# Altium PCB OnkoV1.PcbDoc (part 2 of 2)
Units mil, origin at the board's own origin, x right, y up, seen from the top; angles counter-clockwise.
Board outline 5157.48 x 3228.35 mil, 2 copper layers (Top Layer, Bottom Layer); 231 components, 195 nets, 743 pads, 146 vias.
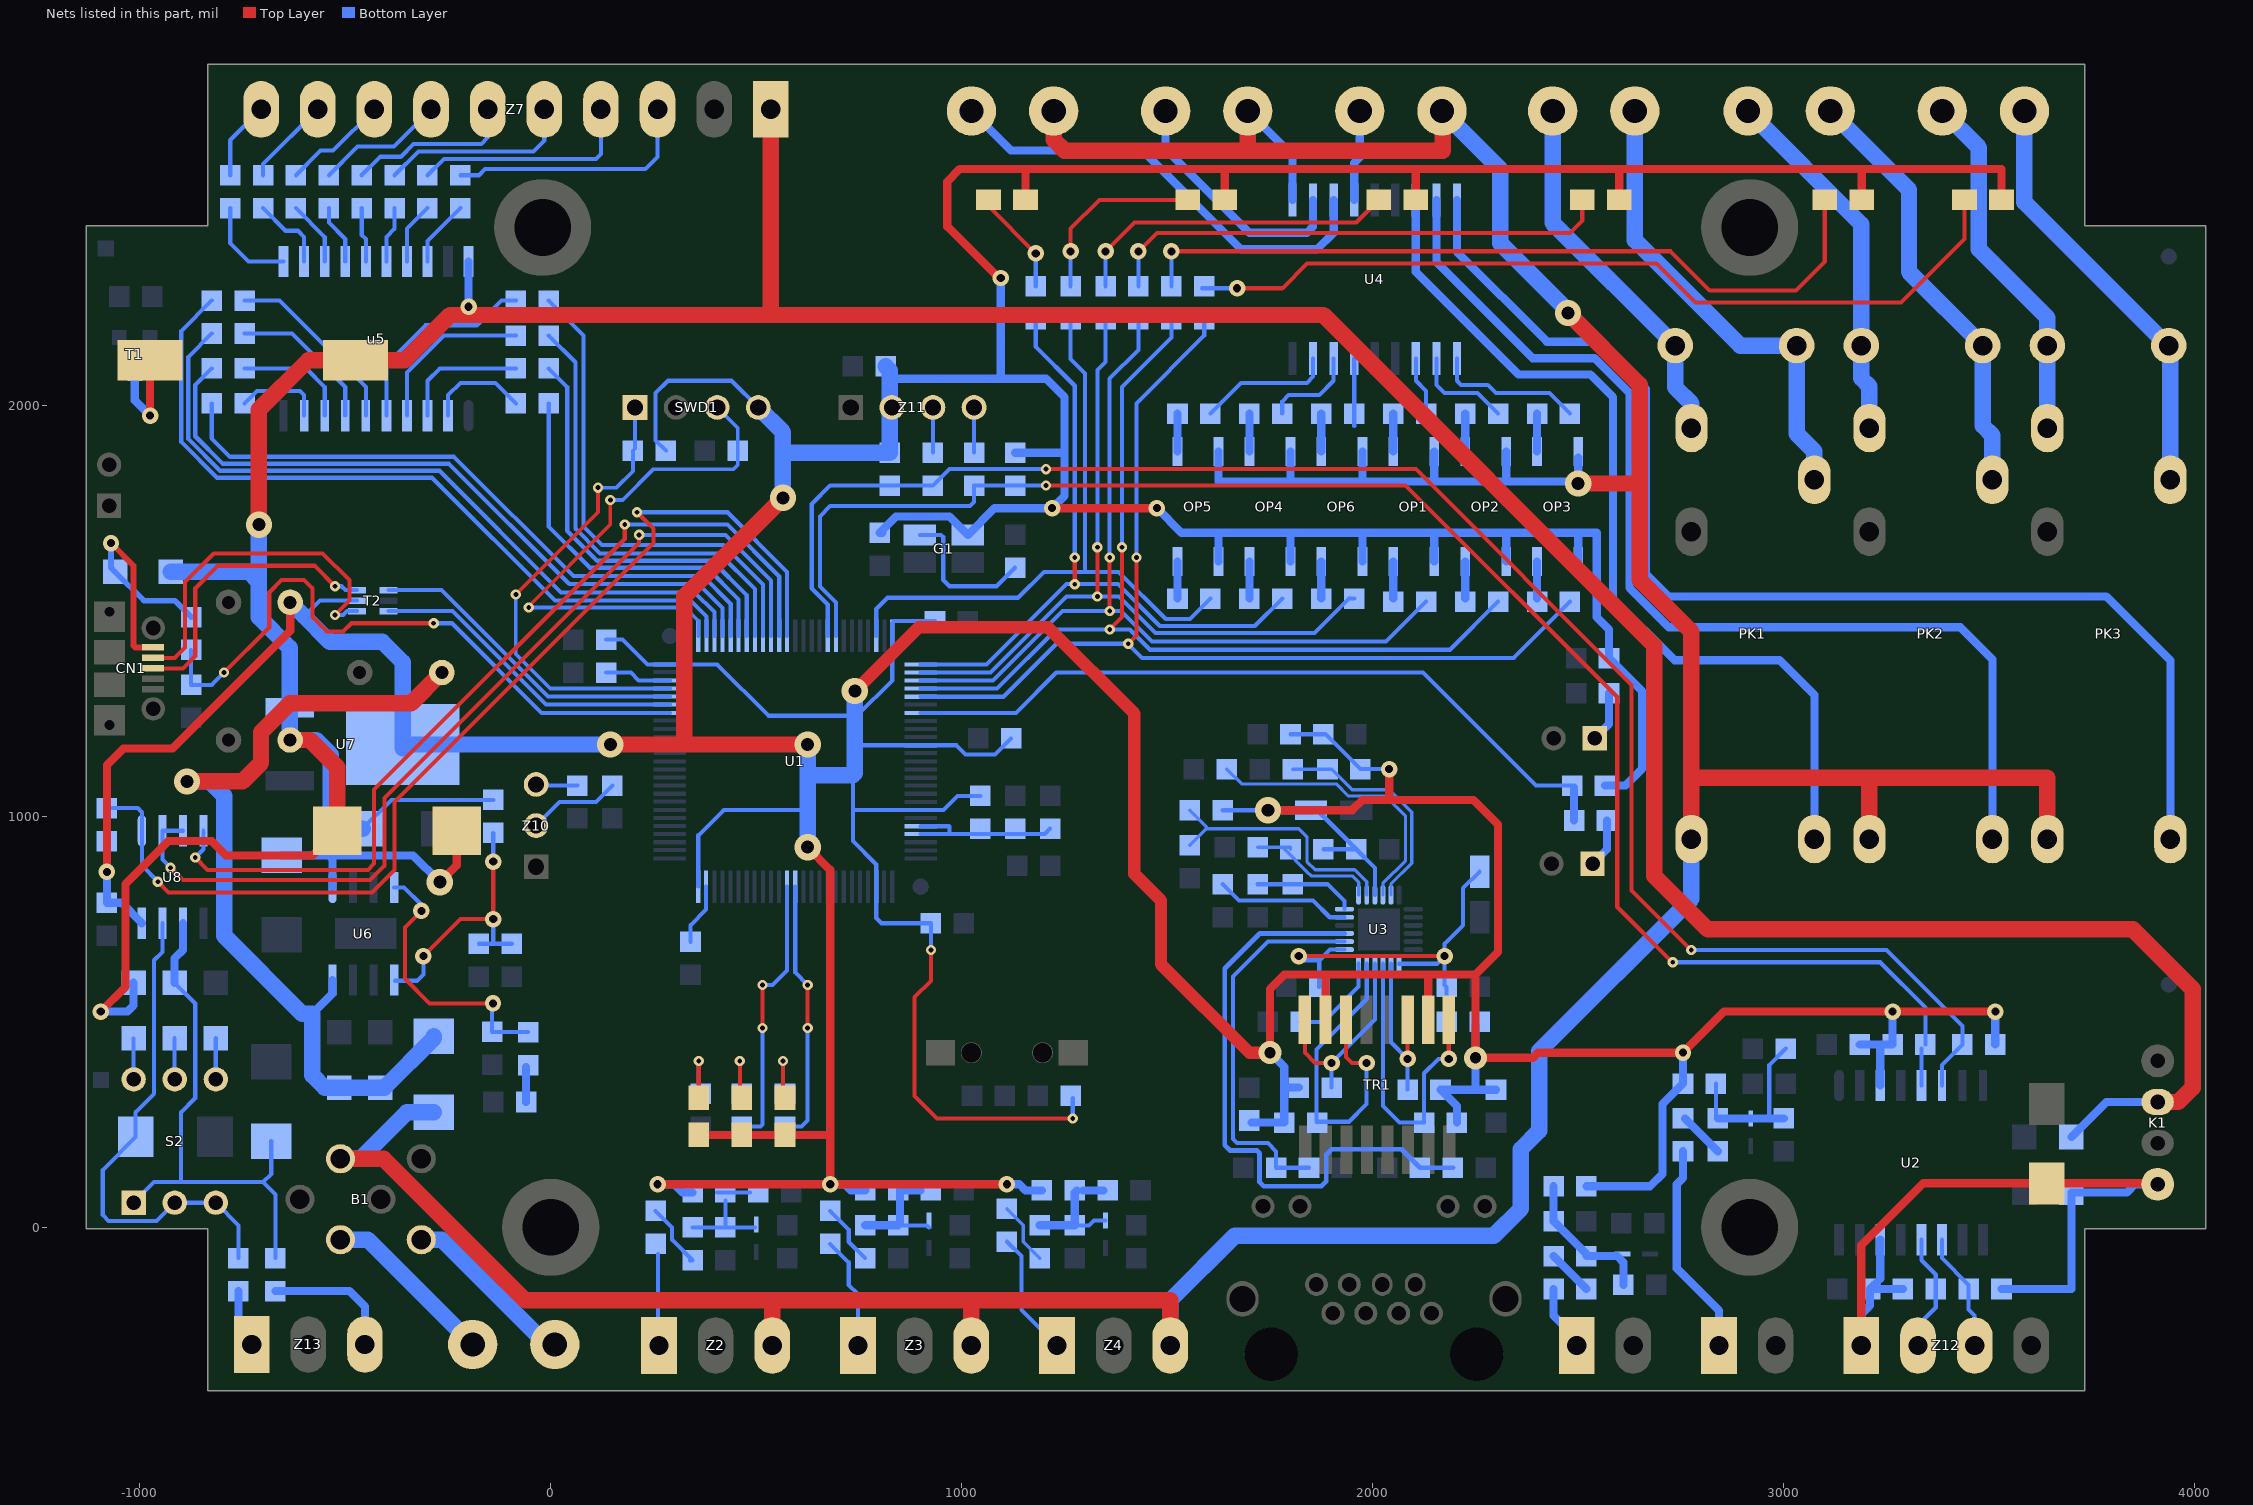
[diagram p2: the nets of this part, all layers, seen from the top]

## Via types
v1: diameter 25, hole 11.81, Top Layer to Bottom Layer, tented both sides, 71 vias
v2: diameter 40, hole 19.68, Top Layer to Bottom Layer, tented both sides, 47 vias
v3: diameter 64, hole 31.5, Top Layer to Bottom Layer, tented both sides, 16 vias
v4: diameter 56, hole 27.56, Top Layer to Bottom Layer, tented both sides, 5 vias
v5: diameter 25, hole 11.81, Top Layer to Bottom Layer, tented bottom, 5 vias
v6: diameter 70.87, hole 39.37, Top Layer to Bottom Layer, tented both sides, 1 vias
v7: diameter 64, hole 31.5, Top Layer to Bottom Layer, 1 vias

## Nets (pads, with @x,y where several pads share a name; then routed paths per layer and width w, separated by ;. In a path a pad name is that pad's centre, name@x,y a point inside that pad or via, vN(x,y) a via of type N, cw(c..) or ccw(c..) an arc to the next point about the centre after c; other vN are vias at no path point) (continued)
KY2: F18.2 R52.1 U1.7 | length 1819.5
  Bottom Layer w10: U1.7@900,1252 1132,1252 1230,1350 2122.44,1350 2397.44,1075 R52.1@2485,1075
  Bottom Layer w20: F18.2@2490,990 R52.1@2490,1070
L+: D8.K F3.1 R56.2 S2.1 U8.6 | length 1315.1
  Bottom Layer w10: S2.1@-1015,60 -965,110 -900,110 ; R56.2@-915.21,595.13 -865,544.91 -865,315 -900,280 -900,110 ; D8.K@-680,210 -680,130 -700,110 ; F3.1@-670,-75 -670,80 -700,110 ; -900,110 -700,110
  Bottom Layer w20: R56.2@-915.21,595.13 -915.21,654.79 -895,675 U8.6@-895,740
L-: D7.K F2.1 S2.2 S2.3 U8.7 | length 1227.1
  Bottom Layer w10: U8.7@-945,740 -945,670 -965,650 -965,325 -1010,280 D7.K@-1010,220 -1090,140 -1090,30 -1075.75,15.75 -959.25,15.75 S2.2@-915,60 S2.3@-815,60 -760,5 F2.1@-760,-75
LED1: R93.2 U1.38 | length 642.6
  Top Layer w10: v1(625,485) v1(625,590)
  Bottom Layer w10: R93.2@570,245 610,245 625,260 v1(625,485) ; U1.38@595,829 595,620 v1(625,590)
LED2: R94.2 U1.39 | length 670.6
  Top Layer w10: v1(515,485) v1(515,590)
  Bottom Layer w10: R94.2@465,245 510,245 515,250 v1(515,485) ; v1(515,590) 540,590 575,625 U1.39@575,829
NetB1_B: B1.B Z1.2 | length 427.5
  Bottom Layer w40: B1.B@-511.85,-30 -445,-30 Z1.2@-190,-285
NetB1_PSG: B1.PSG Z1.1 | length 430.6
  Bottom Layer w40: B1.PSG@-315,-30 -265,-30 -10,-285 Z1.1@10,-285
NetBZ1_2: BZ1.2 T1.3 | length 260.3
  Top Layer w20: v2(-975,1975) BZ1.2@-975,2110
  Bottom Layer w20: T1.3@-1012,2085 -1012,2012 v2(-975,1975)
NetC8_2: C8.2 C9.2 C10.2 L1.1 U3.1 U3.19 | length 1067.2
  Top Layer w10: v2(1820,660) v2(2175,660)
  Bottom Layer w10: v2(1820,660) 1830,650 1870,650 ; C8.2@1870,585 1870,650 ; U3.1@1931.34,675.79 1895.79,675.79 1870,650 ; U3.19@2064.21,641.34 2156.34,641.34 v2(2175,660) ; L1.1@2180,500 C9.2@2180,585 2175,590 v2(2175,660) ; C10.2@2260,865.24 2220,825.24 2220,735 2175,690 v2(2175,660)
NetC11_2: C11.2 C13.2 U3.6 | length 247.9
  Bottom Layer w10: C11.2@1720,835 C13.2@1805,835 1890,835 1931.34,793.66 U3.6@1931.34,774.21
NetC17_1: C17.1 C18.1 R48.1 U1.21 U1.22 | length 408.8
  Bottom Layer w10: U1.22@900,957 970,957 ; U1.21@900,976 969,976 970,975 970,957 ; C17.1@1215,970 1202,957 1130,957 970,957
NetC19_2: C19.2 U1.73 | length 162.9
  Bottom Layer w10: C19.2@135,1350 195,1350 214,1331 U1.73@290,1331
NetC21_2: C21.2 U1.49 | length 149.7
  Bottom Layer w10: C21.2@340,695 340,735 378,773 U1.49@378,829
NetC32_2: C32.2 C38.2 C41.2 D10.K U6.8 | length 2126.5
  Top Layer w40: v3(-885,1085) -750,1085 -705,1130 -705,1205 -635,1275 -340,1275 C41.2@-265,1350
  Bottom Layer w20: -580,520 -531,569 U6.8@-531,602
  Bottom Layer w40: v3(-885,1085) -830,1085 -795,1050 -795,710 -605,520 -580,520 -580,370 -549.87,339.87 C32.2@-515,339.87 C38.2@-415,339.87 -405,339.87 -285,459.87 D10.K@-285,465.04
NetC33_1: C33.1 R89.1 | length 85
  Bottom Layer w20: R89.1@-60,305 C33.1@-60,390
NetC33_2: C33.2 C34.1 U6.4 | length 677.5
  Top Layer w10: v2(-315,770) -355,730 -355,605 -295,545 v2(-140.48,545)
  Bottom Layer w10: U6.4@-381,827 -357,827 -315,785 v2(-315,770) ; v2(-140.48,545) -142.74,542.74 C34.1@-142.74,475.89 -141.85,475 C33.2@-55,475
NetD1_K: D1.K R1.2 R2.2 R3.2 R4.2 | length 296.9
  Bottom Layer w10: R3.2@345,0 R4.2@425,0 ; R1.2@405,85 R2.2@485,85 ; R1.2@425,65 R4.2@425,0 ; D1.K@496.93,0 R4.2@425,0
NetD2_K: D2.K R5.2 R6.2 R7.2 R8.2 | length 287.1
  Bottom Layer w10: R8.2@845,5 915,5 D2.K@920,0
  Bottom Layer w20: R7.2@765,5 R8.2@845,5 ; R8.2@850,10 850,90 R6.2@900,90
NetD3_K: D3.K R9.2 R10.2 R11.2 R12.2 | length 302
  Bottom Layer w10: R12.2@1275,5 1310,5 1321.93,16.93 D3.K@1350,16.93
  Bottom Layer w20: R11.2@1190,5 R12.2@1275,5 1275,85 R9.2@1280,90 ; R9.2@1295,90 R10.2@1345,90
NetD4_K: D4.K R13.2 R14.2 R15.2 R16.2 | length 354.4
  Bottom Layer w20: R13.2@2440,100 R14.2@2440,15 2520,-65 R15.2@2520,-70 2595,-70 2610,-85 R16.2@2610,-140
NetD5_K: D5.K R17.2 R18.2 R19.2 R20.2 | length 428.6
  Bottom Layer w10: R19.2@2835,270 R17.2@2835,350 ; 2960,265 2965,270 2965,395 R18.2@3005,435
  Bottom Layer w20: R19.2@2840,265 D5.K@2920,265 2960,265 R20.2@3000,265
NetD6_K: D6.K L2.1 U6.1 | length 635.8
  Top Layer w20: v3(-270,840) -228.66,881.34 L2.1@-228.66,965
  Bottom Layer w20: D6.K@-655,905 -540,905 ; U6.1@-531,827 -531,896 -540,905 ; v3(-270,840) -335,905 -540,905
NetDK1_K: DK1.K R72.1 | length 1246.1
  Top Layer w10: v2(1430,2375) 1475,2420 2480,2420 2510,2450 DK1.K@2510,2500
  Bottom Layer w10: R72.1@1430,2290 v2(1430,2375)
NetDK2_K: DK2.K R73.1 | length 1893.3
  Top Layer w10: v2(1510,2375) 2725,2375 2820,2280 3030,2280 3100,2350 DK2.K@3100,2500
  Bottom Layer w10: R73.1@1510,2290 v2(1510,2375)
NetDK3_K: DK3.K R74.1 | length 2078.4
  Top Layer w10: v2(1670,2285) 1780,2285 1840,2345 2690,2345 2785,2250 3285,2250 3440,2405 DK3.K@3440,2500
  Bottom Layer w10: R74.1@1585,2285 v2(1670,2285)
NetDK4_K: DK4.K R75.1 | length 257.6
  Top Layer w10: DK4.K@1065,2500 1065,2485 v2(1180,2370)
  Bottom Layer w10: R75.1@1180,2290 v2(1180,2370)
NetDK5_K: DK5.K R76.1 | length 454
  Top Layer w10: v2(1265,2375) 1265,2430 1335,2500 DK5.K@1550,2500
  Bottom Layer w10: R76.1@1265,2290 v2(1265,2375)
NetDK6_K: DK6.K R77.1 | length 801.8
  Top Layer w10: v2(1350,2375) 1420,2445 1960,2445 DK6.K@2015,2500
  Bottom Layer w10: R77.1@1350,2290 v2(1350,2375)
NetF1_1: F1.1 Z2.1 | length 223.5
  Bottom Layer w10: F1.1@260.75,-65 260.75,-80 260.75,-284.84 Z2.1@263.31,-287.4
NetF1_2: F1.2 R3.1 | length 163.5
  Bottom Layer w10: F1.2@255,40 295,0 295,-30 R3.1@345,-80 R3.1@338.74,-80
NetF2_2: F2.2 Z13.1 | length 143.3
  Bottom Layer w20: F2.2@-760,-155 -760,-252.79 Z13.1@-727.79,-285
NetF3_2: F3.2 Z13.3 | length 325.7
  Bottom Layer w20: F3.2@-670,-155 -490,-155 -452.2,-192.8 Z13.3@-452.2,-285
NetF4_1: F4.1 Z3.1 | length 275.4
  Bottom Layer w10: F4.1@680,-40 725,-85 725,-140 747.56,-162.56 Z3.1@747.56,-287.4
NetF4_2: F4.2 R7.1 | length 150.2
  Bottom Layer w10: F4.2@680,40 725,-5 725,-35 R7.1@765,-75
NetF5_1: F5.1 Z4.1 | length 302.9
  Bottom Layer w10: F5.1@1110,-35 1145,-70 1145,-200.59 Z4.1@1231.81,-287.4
NetF5_2: F5.2 R11.1 | length 153.1
  Bottom Layer w8: F5.2@1110,45 1150,5 1150,-35 R11.1@1190,-75
NetF6_1: F6.1 Z5.1 | length 160.6
  Bottom Layer w20: F6.1@2440,-150 2440,-215 2496.06,-271.06 Z5.1@2496.06,-287.4
NetF6_2: F6.2 R15.1 | length 113.1
  Bottom Layer w20: F6.2@2440,-70 R15.1@2520,-150
NetF7_1: F7.1 Z6.1 | length 521.1
  Bottom Layer w20: F7.1@2755,185 2755,120 2740,105 2740,-100 2842.52,-202.52 Z6.1@2842.52,-287.4
NetF7_2: F7.2 R19.1 | length 113.1
  Bottom Layer w20: F7.2@2760,265 R19.1@2840,185
NetF8_1: F8.1 Z11.3 | length 110
  Bottom Layer w10: F8.1@930,1885 Z11.3@930,1995
NetF9_1: F9.1 Z11.4 | length 110
  Bottom Layer w10: F9.1@1030,1885 Z11.4@1030,1995
NetF10_1: F10.1 u5.2 | length 248.1
  Bottom Layer w10: u5.2@-250,1975 -250,2025 -220,2055 -135,2055 F10.1@-85,2005
NetF11_1: F11.1 u5.3 | length 312.4
  Bottom Layer w10: u5.3@-300,1975 -300,2060 -270,2090 F11.1@-85,2090
NetF12_1: F12.1 u5.4 | length 407.3
  Bottom Layer w10: u5.4@-350,1975 -350,2080 -260,2170 F12.1@-85,2170
NetF13_1: F13.1 u5.5 | length 504.2
  Bottom Layer w10: u5.5@-400,1975 -400,2100 -305,2195 -180,2195 -120,2255 F13.1@-85,2255
NetF14_1: F14.1 u5.6 | length 452
  Bottom Layer w10: F14.1@-745,2255 -660,2255 -450,2045 u5.6@-450,1975
NetF15_1: F15.1 u5.7 | length 368.8
  Bottom Layer w10: F15.1@-745,2175 -630,2175 -500,2045 u5.7@-500,1975
NetF16_1: F16.1 u5.8 | length 283.6
  Bottom Layer w10: F16.1@-745,2090 -595,2090 -550,2045 u5.8@-550,1975
NetF17_1: F17.1 u5.9 | length 211.6
  Bottom Layer w10: F17.1@-745,2005 -715,2035 -610,2035 -600,2025 u5.9@-600,1975
NetF18_1: F18.1 KY2.1 | length 119.5
  Bottom Layer w20: KY2.1@2535,885 2570,920 F18.1@2570,990
NetF19_1: F19.1 KY1.1 | length 124.5
  Bottom Layer w20: KY1.1@2540,1190 2575,1225 F19.1@2575,1300
NetG1_3: G1.3 R44.1 | length 363.9
  Bottom Layer w10: G1.3@898,1685 950,1685 955,1680 955,1575 970,1560 1085,1560 R44.1@1130,1605
NetLD1_K: LD1.K R93.1 | length 165
  Top Layer w10: LD1.K@565,315 v1(565,405)
  Bottom Layer w10: R93.1@565,330 v1(565,405)
NetLD2_K: LD2.K R94.1 | length 165
  Top Layer w10: LD2.K@460,315 v1(460,405)
  Bottom Layer w10: R94.1@460,330 v1(460,405)
NetLD3_K: LD3.K R95.1 | length 165
  Top Layer w10: LD3.K@360,315 v1(360,405)
  Bottom Layer w10: R95.1@360,330 v1(360,405)
NetOP1_2: OP1.2 R60.2 | length 90
  Bottom Layer w20: R60.2@2050,1530 OP1.2@2050,1620
NetOP1_3: OP1.3 R61.1 | length 92.3
  Bottom Layer w20: OP1.3@2050,1887.72 R61.1@2050,1980
NetOP2_2: OP2.2 R62.2 | length 90
  Bottom Layer w20: R62.2@2225,1530 OP2.2@2225,1620
NetOP2_3: OP2.3 R63.1 | length 92.3
  Bottom Layer w20: OP2.3@2225,1887.72 R63.1@2225,1980
NetOP3_2: OP3.2 R64.2 | length 90
  Bottom Layer w20: R64.2@2400,1530 OP3.2@2400,1620
NetOP3_3: OP3.3 R65.1 | length 92.3
  Bottom Layer w20: OP3.3@2400,1887.72 R65.1@2400,1980
NetOP4_2: OP4.2 R66.2 | length 90
  Bottom Layer w20: R66.2@1700,1530 OP4.2@1700,1620
NetOP4_3: OP4.3 R67.1 | length 92.3
  Bottom Layer w20: OP4.3@1700,1887.72 R67.1@1700,1980
NetOP5_2: OP5.2 R68.2 | length 90
  Bottom Layer w20: R68.2@1525,1530 OP5.2@1525,1620
NetOP5_3: OP5.3 R69.1 | length 92.3
  Bottom Layer w20: OP5.3@1525,1887.72 R69.1@1525,1980
NetOP6_2: OP6.2 R70.2 | length 90
  Bottom Layer w20: R70.2@1875,1530 OP6.2@1875,1620
NetOP6_3: OP6.3 R71.1 | length 92.3
  Bottom Layer w20: OP6.3@1875,1887.72 R71.1@1875,1980
NetR24_1: R24.1 R30.2 U3.8 | length 629.7
  Bottom Layer w8: R30.2@1555,930 1595,970 ; R24.1@1555,1015 1595,975 1595,970 ; U3.8@1985.47,808.66 1985.47,840.74 1956.21,870 1860,870 1840,890 1840,950.56 1820.56,970 1595,970
NetR25_1: R25.1 R33.2 U3.11 | length 555.7
  Bottom Layer w8: R33.2@1805,1115 R25.1@1890,1115 1900,1115 1950.38,1064.62 2040.38,1064.62 2095,1010 2095,886.21 2044.53,835.74 U3.11@2044.53,808.66
NetR27_1: R27.1 R31.2 U3.7 | length 336.6
  Bottom Layer w8: R31.2@1720,925 R27.1@1780.56,925 ; R27.1@1800,920 1800,925 R27.1@1780.56,925 ; U3.7@1965.79,808.66 1965.79,839.21 1950,855 1850,855 1850,855.56 1841,864.56 R27.1@1780.56,925
NetR32_2: R32.2 U3.24 | length 231.9
  Bottom Layer w10: R32.2@1825,500 1880,500 1965.79,585.79 U3.24@1965.79,641.34
NetR34_2: R34.2 R38.2 U3.3 | length 1488
  Bottom Layer w12: U3.3@1931.34,715.16 1725.16,715.16 1640,630 1640,200 1653,187 1718,187 1725,180 1725,110 1735,100 1875,100 1887,112 1887,177 1900,190 2070,190 R34.2@2115,145 R38.2@2195,145
NetR35_2: R35.2 R37.2 U3.2 | length 939.2
  Bottom Layer w10: R37.2@1845,145 R35.2@1765,145 1765,185 1745,205 1670,205 1660,215 1660,610 1745.47,695.47 U3.2@1931.34,695.47
NetR36_2: R36.2 U3.5 | length 329.7
  Bottom Layer w10: R36.2@1635,835 1675,795 1855,795 1895.47,754.53 U3.5@1931.34,754.53
NetR39_2: R39.2 U3.10 | length 696.8
  Bottom Layer w8: R39.2@1645,1115 1681,1079 1911,1079 1940.38,1049.62 2030.38,1049.62 2080,1000 2080,892.43 2024.84,837.27 U3.10@2024.84,808.66
NetR50_1: R50.1 Z10.3 | length 101.8
  Bottom Layer w10: Z10.3@-35.65,1077.67 -32.98,1075 R50.1@65,1075
NetR51_1: R51.1 Z10.2 | length 226
  Bottom Layer w10: Z10.2@-35.65,977.67 21.67,1035 110,1035 R51.1@150,1075
NetR55_1: R55.1 S2.4 | length 99.9
  Bottom Layer w10: S2.4@-815.21,360.21 R55.1@-815.21,460.13
NetR56_1: R56.1 S2.5 | length 99.9
  Bottom Layer w10: S2.5@-915.21,360.21 R56.1@-915.21,460.13
NetR57_1: R57.1 S2.6 | length 100
  Bottom Layer w10: S2.6@-1015,360 R57.1@-1015,460
NetR78_1: R78.1 u5.18 | length 163.1
  Bottom Layer w10: u5.18@-300,2350 -300,2400 R78.1@-220,2480
NetR79_1: R79.1 u5.17 | length 150.7
  Bottom Layer w10: u5.17@-350,2350 -350,2430 R79.1@-300,2480
NetR80_1: R80.1 u5.16 | length 138.3
  Bottom Layer w10: u5.16@-400,2350 -400,2410 -380,2430 R80.1@-380,2480
NetR81_1: R81.1 u5.15 | length 134.1
  Bottom Layer w10: R81.1@-460,2480 -460,2415 -450,2405 u5.15@-450,2350
NetR82_1: R82.1 u5.14 | length 146.6
  Bottom Layer w10: R82.1@-540,2480 -540,2445 -500,2405 u5.14@-500,2350
NetR83_1: R83.1 u5.13 | length 159
  Bottom Layer w10: R83.1@-620,2480 -550,2410 u5.13@-550,2350
NetR84_1: R84.1 u5.12 | length 189
  Bottom Layer w10: R84.1@-700,2480 -645,2425 -615,2425 -600,2410 u5.12@-600,2350
NetR85_1: R85.1 u5.11 | length 233.6
  Bottom Layer w10: R85.1@-780,2480 -780,2395 -735,2350 u5.11@-650,2350
NetR86_2: R86.2 R87.1 R88.1 U6.5 | length 677.5
  Top Layer w10: v2(-310,660) -220,750 v2(-140,750) v2(-140,890)
  Bottom Layer w10: U6.5@-379,600 -325,600 -310,615 v2(-310,660) ; R87.1@-175,690 -140,690 ; v2(-140,750) -140,690 ; v2(-140,890) R86.2@-140,960 ; R88.1@-95,690 -140,690
PK1: R61.2 U4.3 | length 144.5
  Bottom Layer w10: U4.3@2105,2114.17 2105,2060 2130,2035 R61.2@2130,1980
PK1_A: C29.2 PK1.4 Z15.2 | length 1159
  Bottom Layer w40: Z15.2@2637.8,2716.54 2637.8,2402.2 2894.33,2145.67 C29.2@3031.5,2145.67 3031.5,1931.5 3074.8,1888.19 PK1.4@3074.8,1818.9
PK1_B: C29.1 PK1.5 Z15.1 | length 911.6
  Bottom Layer w40: Z15.1@2437.8,2716.54 2437.8,2444.09 C29.1@2736.22,2145.67 2736.22,2043.78 2775.59,2004.41 PK1.5@2775.59,1944.88
PK2: R63.2 U4.2 | length 243.2
  Bottom Layer w10: U4.2@2155,2114.17 2155,2050 2175,2030 2255,2030 R63.2@2305,1980
PK2_A: C30.2 PK2.4 Z16.2 | length 1061
  Bottom Layer w40: Z16.2@3113.39,2716.54 3305,2524.92 3305,2324.92 C30.2@3484.25,2145.67 3484.25,1950.75 3507.87,1927.13 PK2.4@3507.87,1818.9
PK2_B: C30.1 PK2.5 Z16.1 | length 894
  Bottom Layer w40: Z16.1@2913.39,2716.54 3188.98,2440.95 C30.1@3188.98,2145.67 3188.98,2066.02 3208.66,2046.34 PK2.5@3208.66,1944.88
PK3: R65.2 U4.1 | length 362.3
  Bottom Layer w10: U4.1@2205,2114.17 2205,2060 2215,2050 2280,2050 2300,2030 2430,2030 R65.2@2480,1980
PK3_A: C31.2 PK3.4 Z17.2 | length 1040.7
  Bottom Layer w40: Z17.2@3585.83,2716.54 3585.83,2494.17 3934.33,2145.67 C31.2@3937.01,2145.67 ; PK3.4@3940.95,1818.9 C31.2@3940.95,2141.73
PK3_B: C31.1 PK3.5 Z17.1 | length 877.7
  Bottom Layer w40: Z17.1@3385.83,2716.54 3475,2627.36 3475,2380 3641.73,2213.27 C31.1@3641.73,2145.67 PK3.5@3641.73,1944.88
PK4: R67.2 U4.7 | length 229.9
  Bottom Layer w10: R67.2@1780,1980 1780,2010 1795,2025 1870,2025 1905,2060 U4.7@1905,2114.17
PK5: R69.2 U4.8 | length 331.5
  Bottom Layer w10: R69.2@1605,1980 1680,2055 1840,2055 1855,2070 U4.8@1855,2114.17
PK6: R71.2 U4.6 | length 164.2
  Bottom Layer w10: 1955,1950 U4.6@1955,2114.17
PKK1: PK1.2 U4.16 | length 2209.2
  Bottom Layer w20: U4.16@2105,2500 2105,2325 2355,2075 2530,2075 2585,2020 2585,1529.17 2734.17,1380 2990,1380 3074.8,1295.2 PK1.2@3074.8,944.88
PKK2: PK2.2 U4.17 | length 2619.3
  Bottom Layer w20: U4.17@2155,2500 2155,2348.94 2388.94,2115 2540,2115 2625,2030 2625,1556.1 2721.1,1460 3430,1460 3507.87,1382.13 PK2.2@3507.87,944.88
PKK3: PK3.2 U4.18 | length 2972
  Bottom Layer w20: U4.18@2205,2500 2205,2373.74 2423.74,2155 2550,2155 2665,2040 2665,1590 2720,1535 3785,1535 3940.95,1379.05 PK3.2@3940.95,944.88
PKK4: U4.12 Z18.1 | length 1117.3
  Bottom Layer w20: Z18.1@1023.62,2716.54 1120.16,2620 1440,2620 1680,2380 1865,2380 1905,2420 U4.12@1905,2500
PKK5: U4.11 Z19.1 | length 607.2
  Bottom Layer w20: Z19.1@1496.06,2716.54 1496.06,2623.94 1700,2420 1840,2420 1855,2435 U4.11@1855,2500
PKK6: U4.13 Z20.1 | length 222.1
  Bottom Layer w20: U4.13@1955,2500 1955,2590 1968.5,2603.5 Z20.1@1968.5,2716.54
PP1: R60.1 R72.2 U1.3 | length 2110.4
  Top Layer w10: v1(1360,1500) v1(1360,1630)
  Bottom Layer w10: U1.3@900,1331 1076,1331 1245,1500 v1(1360,1500) 1387.88,1500 1462.68,1425.2 2032.48,1425.2 R60.1@2130,1522.72 ; v1(1360,1630) 1360,2065 1430,2135 R72.2@1430,2210
PP2: R62.1 R73.2 U1.4 | length 2350.8
  Top Layer w10: v1(1360,1455) 1390,1485 v1(1390,1655)
  Bottom Layer w10: U1.4@900,1311 1086,1311 1230,1455 v1(1360,1455) 1408.83,1455 1458.32,1405.51 2187.79,1405.51 R62.1@2305,1522.72 ; v1(1390,1655) 1390,2045 1510,2165 R73.2@1510,2210
PP3: R64.1 R74.2 U1.5 | length 2570.9
  Top Layer w10: v1(1405,1420) 1425,1440 v1(1425,1630)
  Bottom Layer w10: U1.5@900,1291 1101,1291 1230,1420 v1(1405,1420) 1439.17,1385.83 2343.11,1385.83 R64.1@2480,1522.72 ; v1(1425,1630) 1425,2005 1590,2170 R74.2@1590,2210
PP4: R66.1 R75.2 U1.1 | length 1715.1
  Top Layer w10: v1(1275,1565) v1(1275,1630)
  Bottom Layer w10: U1.1@900,1370 1060,1370 1255,1565 v1(1275,1565) 1379.88,1565 1481.88,1463 1713,1463 R66.1@1780,1530 ; R75.2@1180,2210 1180,2142.83 1275,2047.83 v1(1275,1630)
PP5: R68.1 R76.2 U1.98 | length 1614.1
  Bottom Layer w10: U1.98@792,1439 792,1505 819,1532 1137,1532 1200,1595 1300,1595 ; R76.2@1265,2210 1265,2112.95 1300,2077.95 1300,1595 ; R68.1@1605,1530 1555,1480 1496.38,1480 1381.38,1595 1300,1595
PP6: R70.1 R77.2 U1.2 | length 1886.6
  Top Layer w10: v1(1330,1535) v1(1330,1655)
  Bottom Layer w10: U1.2@900,1350 1070,1350 1255,1535 v1(1330,1535) 1382.32,1535 1471.32,1446 1857.97,1446 1941.97,1530 R70.1@1955,1530 ; v1(1330,1655) 1330,2085.91 1350,2105.91 R77.2@1350,2210
R_RXD: R54.2 U1.87 U8.1 | length 2618.1
  Top Layer w10: v1@-960,845 v1(-956,841) -930,815 -435,815 -380,870 -380,1035 250,1665 250,1700 v1(210,1740)
  Bottom Layer w10: R54.2@-1080,1020 -1005,1020 -995,1010 U8.1@-995,965 -995,880 v1(-956,841) ; v1(210,1740) 430,1740 575,1595 U1.87@575,1439
R_TXD: U1.86 U8.4 | length 2177.8
  Top Layer w10: v1(-865,900) -835,870 -445,870 -430,885 -430,1065 180,1675 v1(180,1710)
  Bottom Layer w10: v1(-865,900) -845,920 U8.4@-845,965 ; v1(180,1710) 430,1710 556,1584 U1.86@556,1439
R_TXD_EN: U1.85 U8.2 U8.3 | length 2259
  Top Layer w10: v1(-925,875) -895,845 -440,845 -405,880 -405,1045 215,1665 v1(215,1685)
  Bottom Layer w10: v1(-925,875) -945,895 U8.2@-945,965 U8.3@-895,965 ; v1(215,1685) 425,1685 536,1574 U1.85@536,1439
RD_N: R21.1 TR1.8 U3.22 | length 500.4
  Top Layer w10: TR1.8@1835,505 1835,425 1860,400 v2(1900,400)
  Bottom Layer w10: R21.1@1900,340 v2(1900,400) 2005.47,505.47 U3.22@2005.47,641.34
RD_P: R28.1 TR1.6 U3.23 | length 823.9
  Top Layer w10: TR1.6@1935,505 1935,415 1950,400 v2(1985,400)
  Bottom Layer w10: R28.1@1865,255 R28.1@1863,257 ; v2(1985,400) 1985,300 1942,257 1865,257 R28.1@1863,257 ; U3.23@1985.47,641.34 1985.47,555.47 1863,433 R28.1@1863,257
SCL: F8.2 R42.2 R58.1 U1.92 U2.6 | length 4192.2
  Top Layer w10: v1(1205,1845) 2105,1845 2630,1320 2630,820 v1(2775,675)
  Bottom Layer w10: U1.92@674,1439 674,1516 635,1555 635,1760 680,1805 R58.1@825,1805 F8.2@930,1805 970,1845 v1(1205,1845) ; v1(2775,675) 3250,675 3435,490 R42.2@3435,445 3385,395 U2.6@3385,345
SCL_I: R43.2 U2.11 Z12.3 | length 290.4
  Bottom Layer w10: U2.11@3385,-30 3385,-75 3450,-140 R43.2@3450,-150 3450,-200 3464.57,-214.57 Z12.3@3464.57,-287.4
SDA: F9.2 R40.2 R59.1 U1.93 U2.5 | length 4056.5
  Top Layer w10: v1(1205,1805) 2080,1805 2595,1290 2595,780 v1(2730,645)
  Bottom Layer w10: U1.93@694,1439 694,1520.04 655,1559.04 655,1730 680,1755 1020,1755 1030,1765 F9.2@1030,1805 R59.1@1130,1805 v1(1205,1805) ; v1(2730,645) 3235,645 3345,535 R40.2@3345,445 ; U2.5@3335,345 R40.2@3335,435
SDA_I: R41.2 U2.12 Z12.2 | length 289.8
  Bottom Layer w10: Z12.2@3326.77,-287.4 3326.77,-238.23 3370,-195 R41.2@3370,-150 3370,-115 3335,-80 U2.12@3335,-30
SL1: R78.2 Z7.3 | length 614
  Bottom Layer w10: R78.2@-220,2560 -175,2560 -160,2575 230,2575 259.84,2604.84 Z7.3@259.84,2720.47
SL2: R79.2 Z7.4 | length 552
  Bottom Layer w10: R79.2@-300,2560 -260,2600 110,2600 122.05,2612.05 Z7.4@122.05,2720.47
SL3: R80.2 Z7.5 | length 475.4
  Bottom Layer w10: R80.2@-380,2560 -322,2618 -42,2618 -15.75,2644.25 Z7.5@-15.75,2720.47
SL4: R81.2 Z7.6 | length 413.4
  Bottom Layer w10: R81.2@-460,2560 -415,2605 -365,2605 -334,2636 -169,2636 -153.54,2651.46 Z7.6@-153.54,2720.47
SL5: R82.2 Z7.7 | length 315.1
  Bottom Layer w10: R82.2@-540,2560 -470,2630 -381.81,2630 Z7.7@-291.34,2720.47
SL6: R83.2 Z7.8 | length 257.3
  Bottom Layer w10: R83.2@-620,2560 -560,2620 -529.61,2620 Z7.8@-429.13,2720.47
SL7: R84.2 Z7.9 | length 215.6
  Bottom Layer w10: R84.2@-700,2560 -700,2587.4 Z7.9@-566.93,2720.47
SL8: R85.2 Z7.10 | length 191.7
  Bottom Layer w10: R85.2@-780,2560 -780,2645.2 Z7.10@-704.72,2720.47
SLED1: F10.2 U1.81 | length 924.3
  Bottom Layer w10: F10.2@-5,2005 -5,1705 95,1605 380,1605 457,1528 U1.81@457,1439
SLED2: F11.2 U1.82 | length 1014.7
  Bottom Layer w10: F11.2@-5,2090 40,2045 40,1695 113,1622 393,1622 477,1538 U1.82@477,1439
SLED3: F12.2 U1.83 | length 1108.8
  Bottom Layer w10: F12.2@-5,2170 60,2105 60,1700 120,1640 410,1640 497,1553 U1.83@497,1439
SLED4: F13.2 U1.84 | length 1204.6
  Bottom Layer w10: F13.2@-5,2255 80,2170 80,1705 125,1660 420,1660 516,1564 U1.84@516,1439
SLED5: F14.2 U1.77 | length 1875.7
  Bottom Layer w10: F14.2@-825,2255 -899,2181 -899,1910.92 -812.08,1824 -289,1824 10,1525 340,1525 379,1486 U1.77@379,1439
SLED6: F15.2 U1.78 | length 1793
  Bottom Layer w10: F15.2@-825,2175 -882,2118 -882,1917.96 -805.04,1841 -271,1841 25,1545 350,1545 398,1497 U1.78@398,1439
SLED7: F16.2 U1.79 | length 1705.7
  Bottom Layer w10: F16.2@-825,2090 -865,2050 -865,1925 -798,1858 -248,1858 45,1565 360,1565 418,1507 U1.79@418,1439
SLED8: F17.2 U1.80 | length 1592.9
  Bottom Layer w10: F17.2@-825,2005 -825,1920 -780,1875 -235,1875 55,1585 370,1585 438,1517 U1.80@438,1439
SWCLK: R49.2 SWD1.3 U1.76 | length 1313.8
  Top Layer w9: v1(-53.5,1508.5) -55,1510 145,1710 v1(145,1770)
  Bottom Layer w9: v1(-53.5,1508.5) 326.5,1508.5 359,1476 U1.76@359,1439 ; v1(145,1770) 175,1770 250,1845 445,1845 455,1855 R49.2@455,1890 455,1945 SWD1.3@405,1995
SWDIO: R46.2 SWD1.1 U1.72 | length 1149.2
  Top Layer w9: v1(-85,1540) 115,1740 v1(115,1800)
  Bottom Layer w9: v1(-85,1540) -85,1395 -1,1311 U1.72@290,1311 ; v1(115,1800) 160,1800 200,1840 R46.2@200,1890 ; R46.2@205,1895 SWD1.1@205,1995
TD_N: R22.1 TR1.3 U3.20 | length 418.1
  Top Layer w10: v2(2085,410) TR1.3@2085,505
  Bottom Layer w10: U3.20@2044.53,641.34 2044.53,450.47 v2(2085,410) R22.1@2085,335
TD_P: R29.1 TR1.1 U3.21 | length 752.5
  Top Layer w10: v2(2185,410) TR1.1@2185,505
  Bottom Layer w10: U3.21@2024.84,641.34 2024.84,295.16 2065,255 R29.1@2125,255 2125,375 2160,410 v2(2185,410)
USB_DN: T2.3 U1.70 | length 779.2
  Bottom Layer w10: T2.3@-395,1499.41 -239.41,1499.41 -12,1272 U1.70@290,1272
USB_DP: T2.1 U1.71 | length 792.1
  Bottom Layer w10: T2.1@-395,1550.59 -265.59,1550.59 -7,1292 U1.71@290,1292
USB_FS1_N: CN1.2 T2.4 | length 859.7
  Top Layer w10: CN1.2@-967.44,1385.59 -915,1385.59 -890,1410.59 -890,1570 -820,1640 -555,1640 -490,1575 -490,1525 v1(-525,1490)
  Bottom Layer w10: v1(-525,1490) -505,1490 -495.59,1499.41 T2.4@-471.77,1499.41
USB_FS1_P: CN1.3 T2.6 | length 720.5
  Top Layer w10: CN1.3@-967.44,1360 -895,1360 -865,1390 -865,1555 -810,1610 -575,1610 v1(-525,1560)
  Bottom Layer w10: v1(-525,1560) -508.82,1560 -499.41,1550.59 T2.6@-471.77,1550.59
USB_VBUS: R90.2 R91.1 U1.69 | length 1596.8
  Top Layer w10: v1(-795,1350) -685,1460 -685,1545 -655,1575 -600,1575 -580,1555 -580,1485 -545,1450 -505,1450 -485,1470 v1(-285,1470)
  Bottom Layer w10: R90.2@-875,1405 R91.1@-875,1320 -825,1320 v1(-795,1350) ; v1(-285,1470) -240,1470 -22,1252 U1.69@290,1252
VC3: C6.2 C7.2 C12.2 C14.2 C22.1 C23.1 C24.1 C25.1 C26.1 C27.1 C28.1 C37.2 C40.2 DK1.A DK2.A DK3.A DK4.A DK5.A DK6.A G1.4 L1.2 LD1.A LD2.A LD3.A OP1.1 OP2.1 OP3.1 OP4.1 OP5.1 OP6.1 R1.1 R5.1 R9.1 R13.1 R17.1 R21.2 R22.2 R23.2 R24.2 R25.2 R26.2 R27.2 R28.2 R29.2 R40.1 R42.1 R46.1 R47.2 R48.2 R52.2 R53.1 R54.1 R58.2 R59.2 SWD1.4 T2.5 TR1.2 TR1.7 U1.11 U1.19 U1.28 U1.50 U1.75 U1.100 U2.3 U3.9 U7.2 U8.8 Z11.2 | length 26316.1
  Top Layer w10: v1(925,675) 925,600 885,560 885,320 940,265 v1(1270,265)
  Top Layer w20: v2(-1080,865) -1080,1125 -1040,1165 -920,1165 -634.09,1450.91 C37.2@-634.09,1520.94 ; v2(260,105) v2(680,105) ; LD3.A@360,225 LD2.A@465,225 LD1.A@570,225 680,225 ; v3(625,925) 680,870 680,225 ; v2(1095,2310) 1095,2305 965,2435 965,2545 995,2575 1155,2575 ; v2(1110,105) v2(680,105) ; DK4.A@1155,2500 1155,2575 ; v2(1220,1750) v2(1475,1750) ; DK5.A@1640,2500 1640,2575 ; v3(1745,1015) 1950,1015 1975,1040 2040,1040 ; v4(1750,425) 1750,580 1785,615 1885,615 ; TR1.7@1885,505 1885,615 ; v2(2040,1115) 2040,1040 ; DK6.A@2105,2500 2105,2575 ; TR1.2@2135,505 2135,615 ; DK1.A@2600,2500 2600,2575 ; DK2.A@3190,2500 3190,2575 ; v2(3515,525) v2(3265,525) 2855,525 v2(2755,425) 2402.5,425 2390,412.5 v4(2250,412.5) 2250,615 ; DK3.A@3530,2500 3530,2575 3190,2575 ; v2(680,105) 680,225 ; 1155,2575 1640,2575 ; 1640,2575 2105,2575 ; 1885,615 2135,615 ; 2040,1040 2245,1040 2305,980 2305,670 2250,615 ; 2105,2575 2600,2575 ; 2135,615 2250,615 ; 2600,2575 3190,2575
  Top Layer w30: v3(740,1305) 895,1460 1210,1460 1420,1250 1420,860 1485,795 1485,640 1700,425 v4(1750,425)
  Top Layer w40: v3(145,1175) 325,1175 ; v3(565,1775) 325,1535 325,1175 ; v3(625,1175) 325,1175
  Bottom Layer w10: -600,1486.85 -561.85,1525 T2.5@-471.77,1525 ; C22.1@135,1430 175,1430 235,1370 U1.75@290,1370 405,1370 530,1245 740,1245 745,1245 831,1331 U1.100@831,1439 831,1471 835,1475 C28.1@935,1475 ; R46.1@280,1890 255,1915 255,2030 285,2060 440,2060 SWD1.4@505,1995 ; U1.50@359,829 359,954 421,1016 625,1016 ; 735,1100 735,1020 ; 740,1175 742,1173 U1.11@900,1173 987,1173 1009,1151 1081,1151 C23.1@1120,1190 ; Z11.2@825,1990 Z11.2@830,1995 ; v1(925,675) C27.1@925,740 805,740 792,753 U1.28@792,829 792,883 735,940 735,1020 ; R48.2@1045,1050 990,1050 956,1016 U1.19@900,1016 739,1016 735,1020 ; v1(1270,265) R53.1@1270,315 ; R24.2@1635,1015 v3(1745,1015) ; R26.2@1800,1200 R23.2@1880,1200 1885,1200 R25.2@1970,1115 v2(2040,1115) ; C14.2@1849.76,1015 1865,1015 C12.2@1960,920 ; R27.2@1880,920 C12.2@1960,920 ; U3.9@2005.16,808.66 2005.16,874.84 C12.2@1960,920
  Bottom Layer w20: R54.1@-1080,940 v2(-1080,865) C25.1@-1080,790 -1045,790 U8.8@-995,740 ; v2(260,105) 300,105 320,85 R1.1@345,85 ; v2(680,105) 715,105 730,90 R5.1@765,90 ; C26.1@807,1690 C26.1@800,1690 840,1730 970,1730 G1.4@1015,1685 1080,1750 v2(1220,1750) 1250,1780 1250,1885 ; Z11.2@830,1995 830,2065 1095,2065 ; v2(1095,2310) 1095,2065 ; v2(1110,105) 1140,105 1155,90 R9.1@1195,90 ; R59.2@1130,1885 1250,1885 ; v2(1475,1750) 1535,1690 1625,1690 ; OP5.1@1625,1620 1625,1690 ; C6.2@1705,255 R28.2@1785,255 1785,340 ; v3(1745,1015) C14.2@1849.76,1015 ; v4(1750,425) 1785,390 1785,340 ; OP4.1@1800,1620 1800,1690 ; R21.2@1820,340 1785,340 ; OP6.1@1975,1620 1975,1690 ; OP1.1@2150,1620 2150,1690 ; R29.2@2205,255 2205,295 R22.2@2165,335 2250,335 ; L1.2@2250,490 v4(2250,412.5) 2250,335 ; C7.2@2300,335 2250,335 ; OP2.1@2325,1620 2325,1690 ; OP3.1@2500,1612.72 OP3.1@2500,1620 2500,1690 ; R13.1@2520,100 2675,100 2705,130 2705,300 R17.1@2755,350 v2(2755,425) ; R52.2@2565,1075 2615,1075 2655,1115 2655,1305 R47.2@2575,1385 2575,1455 2545,1485 2545,1690 2500,1690 ; C40.2@3185,445 3235,445 ; U2.3@3235,345 3235,445 ; v2(3265,525) R40.1@3265,445 3235,445 ; R42.1@3515,445 v2(3515,525) ; 1095,2065 1205,2065 1250,2020 1250,1885 ; 1625,1690 1800,1690 ; 1800,1690 1975,1690 ; 1975,1690 2150,1690 ; 2150,1690 2325,1690 ; 2325,1690 2500,1690
  Bottom Layer w40: C37.2@-634.09,1520.94 -600,1486.85 -538.15,1425 -410,1425 -360,1375 U7.2@-360,1175 ; U7.2@-360,1166 U7.2@-360,1175 ; v3(145,1175) U7.2@-360,1175 ; SWD1.4@505,1995 565,1935 565,1880 ; v3(565,1775) 565,1880 ; v3(625,925) 625,1016 625,1100 ; v3(625,1175) 625,1100 ; v3(740,1305) 740,1245 740,1175 740,1105 735,1100 625,1100 ; C24.1@815,2095 825,2085 825,1990 R58.2@825,1885 570,1885 565,1880
VC5: BZ1.1 C35.2 C36.2 D9.K K1.2 L2.2 R57.2 R86.1 u5.20 U7.3 Z7.1 Z8.1 | length 10157.2
  Top Layer w20: v2(-1095,525) -1035,585 -1035,835 -930,940 -825,940 -790,905 -580,905 L2.2@-520,965
  Top Layer w40: v3(-710,1710) -710,1990 -590,2110 BZ1.1@-475,2110 -355,2110 -245,2220 535,2220 ; C36.2@-634.09,1185.94 -585.94,1185.94 -520,1120 L2.2@-520,965 ; Z7.1@535.43,2720.47 535.43,2220.43 535,2220 ; K1.2@3910,305 3960,305 3995,340 3995,580 3850,725 2815,725 2685,855 2685,1415 1880,2220 535,2220
  Bottom Layer w10: C35.2@-457.91,970 -387.91,1040 R86.1@-140,1040
  Bottom Layer w20: v2(-1095,525) -1030,525 -1015,540 R57.2@-1015,595 ; v2(-200,2240) u5.20@-200,2350 ; Z8.1@3700,220 3785,305 K1.2@3910,305 K1.2@3940,305
  Bottom Layer w40: D9.K@-925,1595 -735,1595 -710,1570 ; v3(-710,1710) -710,1570 ; C36.2@-635,1186.85 U7.3@-635,1255 ; U7.3@-635,1264 -635,1410 -710,1485 -710,1570 ; C36.2@-634.09,1185.94 -570.94,1185.94 -535,1150 -535,995 -510,970 C35.2@-457.91,970
VC24: B1.CB D10.A OP1.4 OP2.4 OP3.4 OP4.4 OP5.4 OP6.4 PK1.1 PK2.1 PK3.1 U4.10 Z2.3 Z3.3 Z4.3 Z18.2 Z19.2 Z20.2 | length 11003.6
  Top Layer w40: B1.CB@-511.85,166.85 -406.85,166.85 -62.6,-177.4 1025,-177.4 ; Z2.3@538.9,-287.4 538.9,-178.5 ; Z3.3@1023.15,-287.4 1023.15,-179.25 1025,-177.4 ; Z18.2@1223.62,2716.54 1223.62,2646.38 1250,2620 1700,2620 ; Z4.3@1507.4,-287.4 1507.4,-177.4 1025,-177.4 ; Z19.2@1696.06,2716.54 1696.06,2623.94 1700,2620 ; Z20.2@2168.5,2716.54 2170,2715.04 2170,2620 1700,2620 ; v3(2475,2225) 2650,2050 2650,1810 ; v3(2500,1810) 2650,1810 ; PK1.1@2775.59,944.88 2775.59,1094.49 ; PK2.1@3208.66,944.88 3208.66,1094.49 ; PK3.1@3640,943.15 PK3.1@3641.73,944.88 3641.73,1094.49 2775.59,1094.49 ; 2650,1810 2650,1575 2775.59,1449.41 2775.59,1094.49
  Bottom Layer w20: OP5.4@1625,1887.72 1625,1815 1800,1815 ; Z19.2@1696.06,2716.54 1805,2607.6 U4.10@1805,2500 ; OP4.4@1800,1887.72 1800,1815 ; 1970,1815 1800,1815 ; OP6.4@1975,1887.72 1975,1815 2150,1815 ; OP1.4@2150,1887.72 2150,1815 ; OP2.4@2325,1887.72 2325,1815 ; v3@2495,1815 2325,1815 ; v3@2500,1815 OP3.4@2500,1872.72 ; 2150,1815 2325,1815
  Bottom Layer w40: B1.CB@-511.85,166.85 -463.15,166.85 -350,280 D10.A@-285,280 ; Z4.3@1507.4,-287.4 1507.4,-177.4 1664.8,-20 2295,-20 2360,45 2360,190 2405.51,235.51 2405.51,429.13 2775.59,799.21 PK1.1@2775.59,944.88 ; Z20.2@2168.5,2716.54 2310,2575.04 2310,2395 2475,2230 v3(2475,2225)
VCI5: C15.2 C16.2 K1.4 R41.1 R43.1 U2.14 Z8.2 Z12.1 | length 2027.2
  Top Layer w20: Z12.1@3188.98,-287.4 3188.98,-43.31 3339.37,107.09 C15.2@3640,107.09 K1.4@3900,107.09
  Bottom Layer w20: Z12.1@3188.98,-287.4 3188.98,-211.02 3210,-190 C16.2@3210,-150 ; U2.14@3235,-30 3235,-125 C16.2@3210,-150 ; R41.1@3290,-150 C16.2@3210,-150 ; R43.1@3530,-150 3700,-150 Z8.2@3700,85 3835,85 3855,105 K1.4@3910,105 K1.4@3940,105
VUSB: CN1.1 D9.A R90.1 | length 626.6
  Top Layer w14: v2(-1070,1665) -1015,1610 -1015,1415 -1011.18,1411.18 CN1.1@-967.44,1411.18
  Bottom Layer w14: v2(-1070,1665) -1070,1605 D9.A@-1060,1595 -990,1525 -915,1525 R90.1@-875,1485
pads on no net: CN1.4 G1.1 MM1. MM2. MM3. MM4. PK1.3 PK2.3 PK3.3 RESET1.0 TR1.4 TR1.5 U1.9 U1.13 U1.15 U1.17 U1.18 U1.23 U1.26 U1.37 U1.40 U1.41 U1.42 U1.43 U1.44 U1.45 U1.46 U1.47 U1.53 U1.54 U1.57 U1.58 U1.59 U1.60 U1.61 U1.62 U1.63 U1.64 U1.65 U1.66 U1.88 U1.89 U1.90 U1.91 U1.94 U1.95 U1.96 U1.97 U1.101 U1.102 U2.2 U2.4 U2.8 U3.4 U4.4 U4.5 U4.14 U4.15 U6.2 U6.6 ZE1.0

## Polygon pours and split planes (outlines as drawn)
VC3 on Bottom Layer "B_VC3" (solid, remove dead copper, pour order 2): 850,880 850,1390 340,1390 340,880
GND on Top Layer "B_GND" (solid, remove dead copper, pour order 4): 1880,2220 2685,1415 2685,650 2685,475 1575,475 1575,-125 150,-125 150,255 145,250 -1130,250 -1130,2220

## Keep-outs
Keep-Out Layer:
  the board outline again, w7.87

## Silkscreen, mask and mechanical layers (free items; w line width, h text height)
Top Overlay:
  circle w10: c1315,625 r23.77
  circle w10: c1314.82,681.1 r23.77
  circle w10: c760,485 r23.77
  circle w10: c810,485 r23.77
  circle w10: c858.12,484.25 r23.77
  lines w7.87: -165.35,-181.1 -165.35,157.48 -129.92,192.91 ; -149.61,192.91 -129.92,192.91 ; -129.92,173.23 -129.92,192.91
  lines w15.75: 291.34,1444.88 291.34,1874.02 1271.65,1874.02 1271.65,1444.88 291.34,1444.88
  text "S1" at 287.4,2535.43 h45 r90
  text "S2" at 141.73,2523.62 h45 r90
  text "S7" at -539.37,2519.69 h45 r90
  text "S5" at -263.78,2519.69 h45 r90
  text "S4" at -133.86,2519.69 h45 r90
  text "S8" at -688.98,2515.75 h45 r90
  text "S6" at -409.45,2515.75 h45 r90
  text "GND" at 421.26,2484.25 h45 r90
  text "VC5" at 559.06,2484.25 h45 r90
  text "1" at 110.24,1976.38 h45
  text "1" at 641.73,1968.5 h45
  text "OnkoProject" at 358.27,1740.16 h80
  text "GEKA" at 637.8,1614.17 h60
  text "2020.08.10" at 484.25,1492.13 h60
  text "1" at -15.75,779.53 h45 r90
  text "ADC" at 1295.28,732.28 h45
  text "5" at 1362.2,665.35 h45
  text "4" at 1360,602.36 h45
  text "ADC" at 751.97,531.5 h45
  text "POL1" at -988.19,425.2 h45 r90
  text "TERM" at -885.83,425.2 h45 r90
  text "POL2" at -787.4,425.2 h45 r90
  text "ZAS" at 385.83,409.45 h45 r90
  text "LED2" at 492.13,409.45 h45 r90
  text "LED1" at 594.49,409.45 h45 r90
  text "1" at 744.09,393.7 h45
  text "2" at 795.28,393.7 h45
  text "3" at 854.33,393.7 h45
  text "+24" at -102.36,192.91 h45
  text "V24" at 559.06,-161.42 h45 r90
  text "V24" at 1043.31,-161.42 h45 r90
  text "V24" at 1527.56,-161.42 h45 r90
  text "INP" at 2519.68,-161.42 h45 r90
  text "GND" at 2657.48,-161.42 h45 r90
  text "VC5" at 3208.66,-161.42 h45 r90
  text "GND" at 429.13,-165.35 h45 r90
  text "GND" at 913.39,-165.35 h45 r90
  text "GND" at 1397.64,-165.35 h45 r90
  text "SDA" at 3346.46,-165.35 h45 r90
  text "INP" at 287.4,-169.29 h45 r90
  text "INP" at 771.65,-169.29 h45 r90
  text "INP" at 1255.91,-169.29 h45 r90
  text "SCL" at 3492.13,-169.29 h45 r90
  text "GND" at 3622.05,-169.29 h45 r90
  text "GND" at -51.18,-185.04 h45
Mechanical 1:
  the board outline again, w7.87
Mechanical 2:
  lines w7.87: -1137.8,2039.37 -937.01,2039.37 -937.01,2098.43 -803.15,2098.43 -803.15,2433.07 -862.2,2433.07 ; -1122.05,393.7 4015.75,393.7 ; -251.97,2826.77 -251.97,2098.43 -118.11,2098.43 -118.11,2039.37 2996.06,2039.37 2996.06,2098.43 3129.92,2098.43 3129.92,2826.77 ; 3740.16,2433.07 3681.1,2433.07 3681.1,2098.43 3814.96,2098.43 3814.96,2039.37 4015.75,2039.37

## Text inside footprints (layer, text, board x,y; h text height)
K1: Top Overlay "OUT" at 3755,250 h55 r270; Top Overlay "INP" at 3755,480 h55 r270; Top Overlay "-" at 3815,225 h55 r270; Top Overlay "+" at 3820,80 h55 r270; Top Overlay "+" at 3805,325 h55 r270; Top Overlay "-" at 3815,430 h55 r270
TR1: Top Overlay "1" at 2244,481 h55 r180
ZE1: Top Overlay "1" at 2133.11,-323.98 h55